# Altium PCB PCB_OuvrePorte2couches.PcbDoc
Units mm, origin at the board's own origin, x right, y up, seen from the top; angles counter-clockwise.
Board outline 127 x 101.6 mm, 2 copper layers (Top Layer, Bottom Layer); 21 components, 24 nets, 115 pads, 0 vias.
Unrouted connection lines stored in the file: 59.
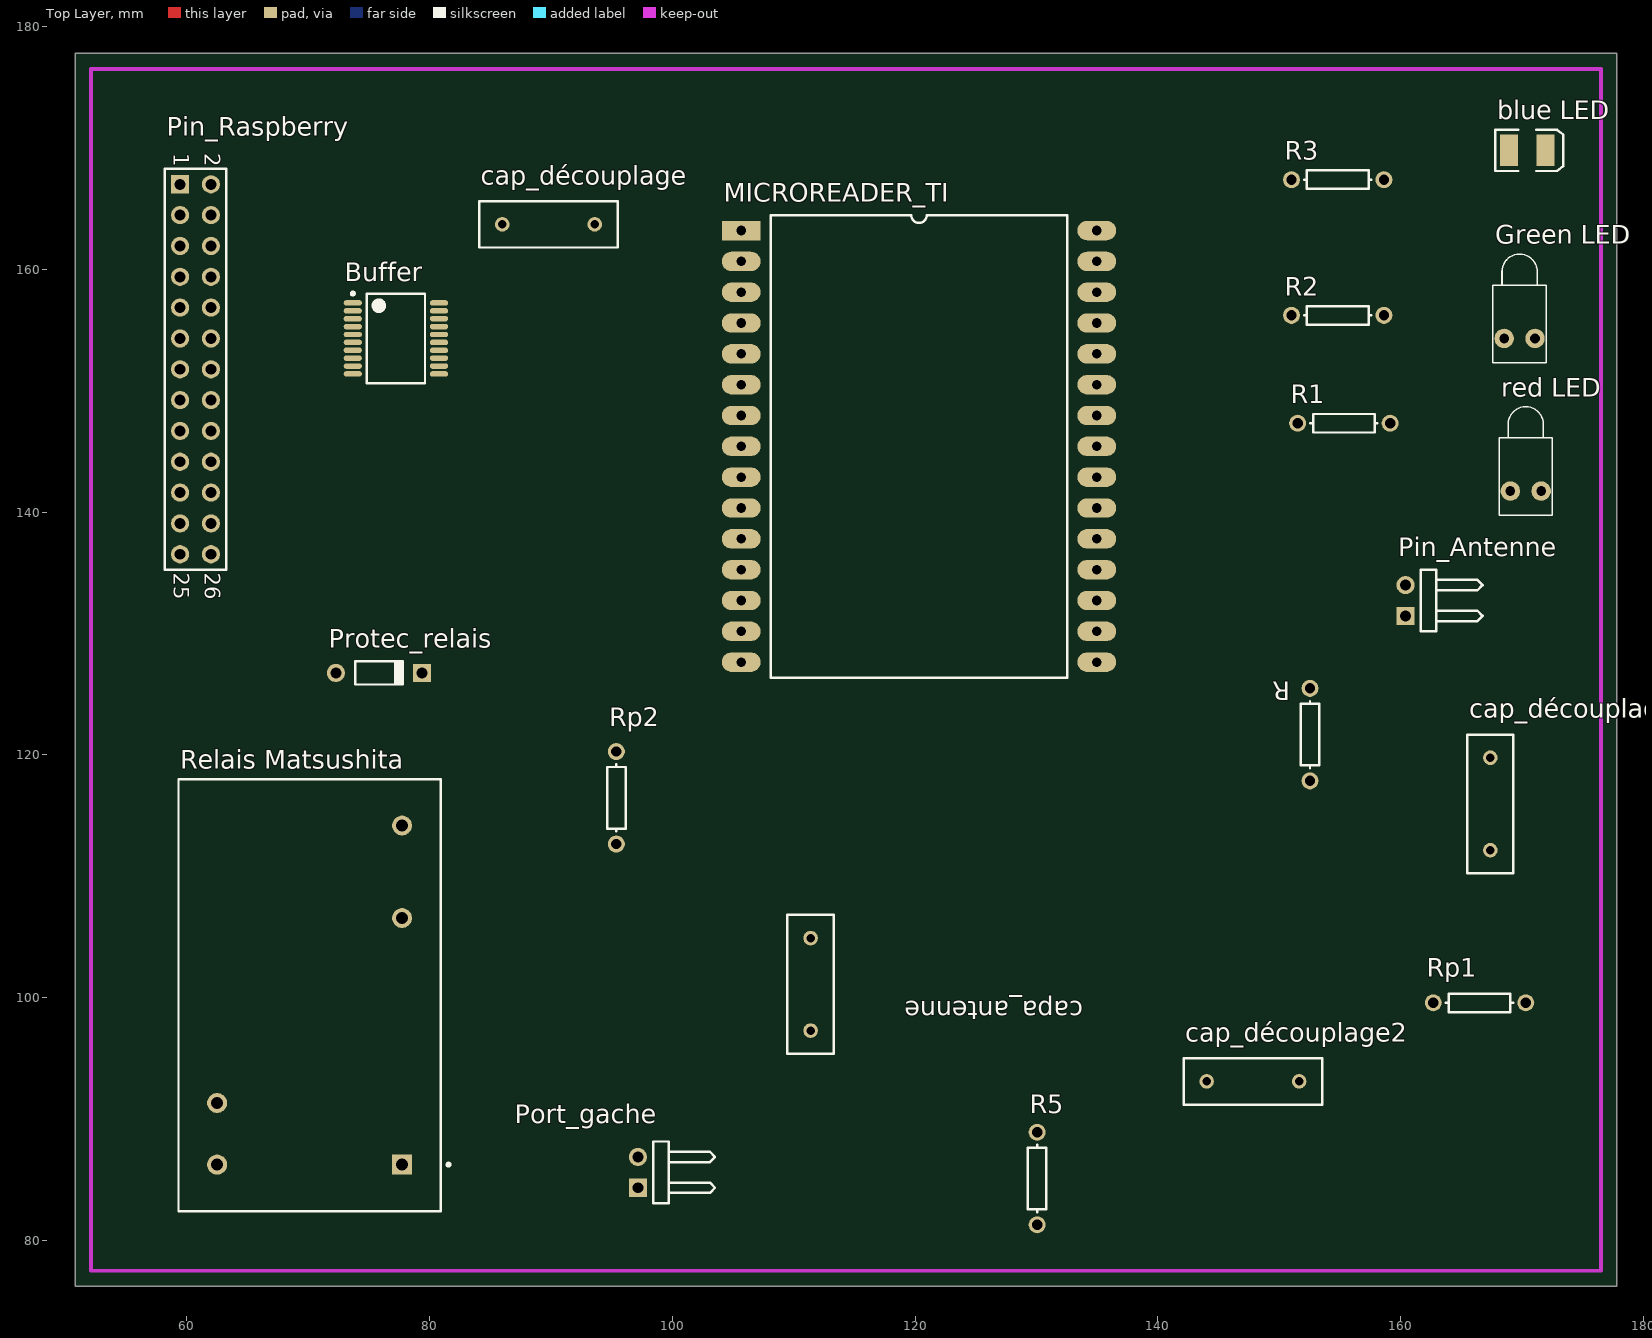
[diagram p0: Top Layer view]
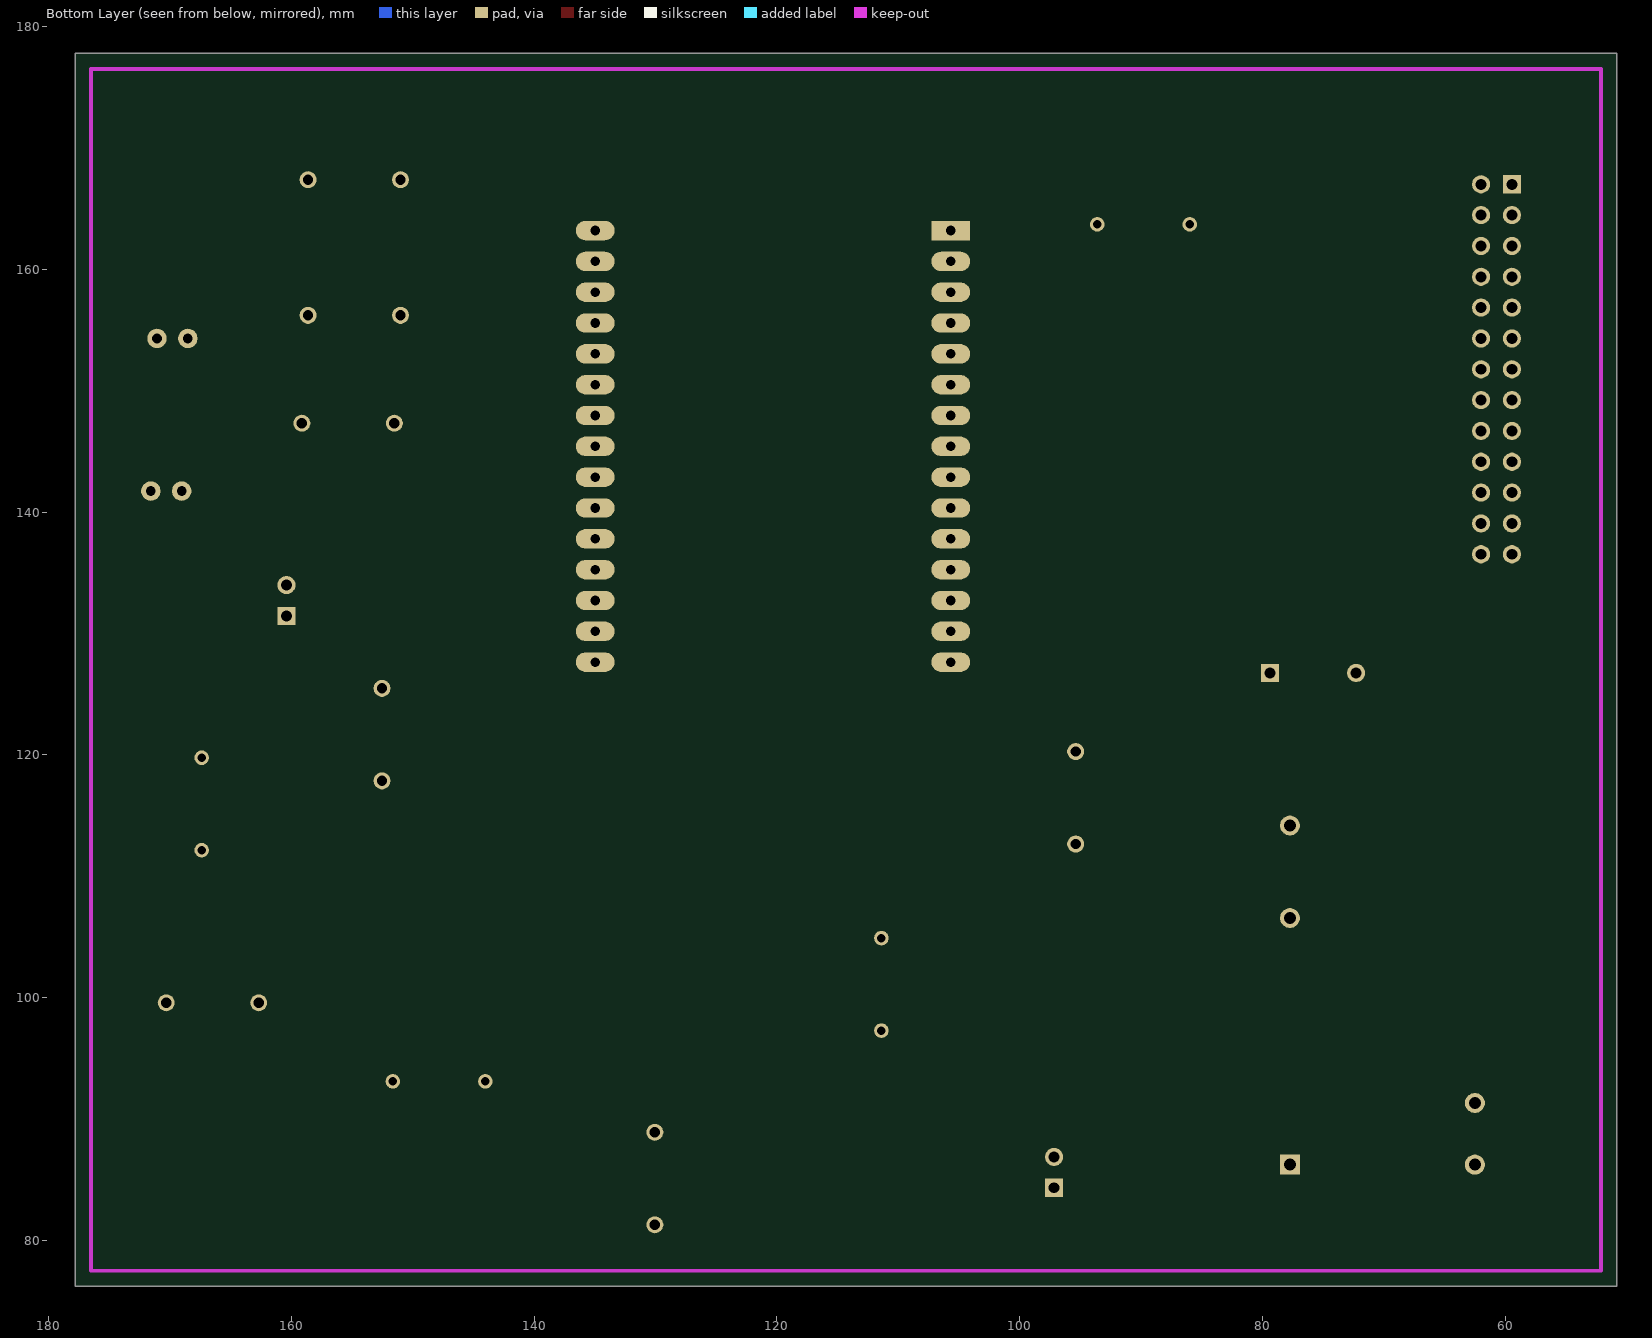
[diagram p1: Bottom Layer view, seen from below]

## Layer stack, top to bottom
Top Layer: signal copper 0.0356
Dielectric: dielectric 0.32, FR-4, Dk 4.8
Bottom Layer: signal copper 0.0356

## Board outline
50.8,76.2 177.8,76.2 177.8,177.8 50.8,177.8

## Design rules (kind name [scope] priority, off if disabled: settings)
Clearance [All] p1: gap=0.2
PolygonConnect [All] p1: connectstyle=Relief reliefconductorwidth=0.254 reliefentries=4 polygonreliefangle="90 Angle" airgapwidth=0.254
RoomDefinition "Schematic Ouvre_Porte" [InComponentClass('Schematic Ouvre_Porte')] p1: confinementstyle=ConfineIn formatcopy=TRUE lockcomponents=FALSE outline 178.943,77.724 485.648,77.724 485.648,119.126 178.943,119.126
RoutingVias [All] p1: holewidth=0.6 width=1 viastyle="Through Hole" minholewidth=0.711 minwidth=1.27 maxholewidth=0.711 maxwidth=1.27
SolderMaskExpansion [All] p1: expansion=0.102
Width [All] p1: maxlimit=0.2 minlimit=0.2 preferedwidth=0.2
28 further rules are at their usual default settings.

## Components (designator, comment, footprint, x,y, rotation, side; value= is the part's Value field where it differs from the comment)
"blue LED" "LED3" 3.5X2.8X1.9 170.434,169.799 r0 top
Buffer "74ACT244MSA" MSA20_L 77.216,154.305 r0 top
cap_découplage "Cap" RAD-0.3 89.789,163.703 r180 top
cap_découplage2 "Cap" RAD-0.3 147.828,93.091 r180 top
cap_découplage3 "Cap" RAD-0.3 167.386,115.951 r270 top
capa_antenne "Cap" RAD-0.3 111.379,101.092 r270 top
"Green LED" "LED1" LED-1 169.799,154.305 r90 top
MICROREADER_TI "MICROREADER" DIP30 105.664,163.195 r0 top
Pin_Antenne "Header 2H" HDR1X2H 160.401,131.445 r90 top
Pin_Raspberry "Header 13X2" HDR2X13 59.436,167.005 r270 top
Port_gache "Header 2H" HDR1X2H 97.155,84.328 r90 top
Protec_relais "Diode 1N4148" DO-35 75.819,126.746 r0 top
R "Res1" AXIAL-0.3 152.527,121.666 r270 top
R1 "Rr" AXIAL-0.3 155.321,147.32 r180 top
R2 "Rg" AXIAL-0.3 154.813,156.21 r180 top
R3 "Rb" AXIAL-0.3 154.813,167.386 r180 top
R5 "Res1" AXIAL-0.3 130.048,85.09 r90 top
"red LED" "LED1" LED-1 170.307,141.732 r90 top
"Relais Matsushita" "Relay" MODULE5B 70.104,100.203 r90 top
Rp1 "" AXIAL-0.3 166.497,99.568 r180 top
Rp2 "Rr" AXIAL-0.3 95.377,116.459 r90 top

## Footprints (in the part's own frame and the unit in brackets; to place one, negate y for a bottom-side part, rotate by r counter-clockwise, add the part's x,y. Pads: shape width x height; smd on the part's side, far side on the other; paste and mask are expansions set on the pad)
3.5X2.8X1.9 [mm] "SM LED; 2 C-Bend Leads; Body 3.5 x 2.8 x 1.9 mm, inc leads (LxWxH typ)"
  rect 1.5x2.6 smd: 1(-1.5,0) 2(1.5,0)
  silkscreen extent -2.65,-1.7 2.95,1.7
AXIAL-0.3 [mm] "Axial Device, Thru-Hole; 2 Leads; 0.3 in Pin Spacing"
  round 1.4 hole 0.85: 1(-3.81,0) 2(3.81,0)
  silkscreen extent -2.77,-0.76 2.77,0.76
DIP30 [mm]
  rect 3.2x1.6 hole 0.8: 1(0,0)
  oval 3.2x1.6 hole 0.8: 2(0,-2.54) 3(0,-5.08) 4(0,-7.62) 5(0,-10.16) 6(0,-12.7) 7(0,-15.24) 8(0,-17.78) 9(0,-20.32) 10(0,-22.86) 11(0,-25.4) 12(0,-27.94) 13(0,-30.48) 14(0,-33.02) 15(0,-35.56) 16(29.3,-35.56) 17(29.3,-33.02) 18(29.3,-30.48) 19(29.3,-27.94) 20(29.3,-25.4) 21(29.3,-22.86) 22(29.3,-20.32) 23(29.3,-17.78) 24(29.3,-15.24) 25(29.3,-12.7) 26(29.3,-10.16) 27(29.3,-7.62) 28(29.3,-5.08) 29(29.3,-2.54) 30(29.3,0)
  silkscreen extent 2.43,-36.83 26.87,1.27
DO-35 [mm] "Diode, Axial; Body 3.8 x 1.9 mm (LxDia. max), Lead Dia. 0.53 mm (max)"
  round 1.5 hole 0.9: 1(-3.55,0)
  rect 1.5x1.5 hole 0.9: 2(3.55,0)
  silkscreen extent -1.95,-0.95 2.05,0.95
HDR1X2H [mm] "Connector; Header; 2 Position; Right Angle"
  rect 1.5x1.5 hole 0.9: 1(0,0)
  round 1.5 hole 0.9: 2(2.54,0)
  silkscreen extent -1.27,-6.35 3.81,-1.27
HDR2X13 [mm] "Connector; Header; 13x2 Position"
  rect 1.5x1.5 hole 0.9: 1(0,0)
  round 1.5 hole 0.9: 2(0,2.54) 3(2.54,0) 4(2.54,2.54) 5(5.08,0) 6(5.08,2.54) 7(7.62,0) 8(7.62,2.54) 9(10.16,0) 10(10.16,2.54) 11(12.7,0) 12(12.7,2.54) 13(15.24,0) 14(15.24,2.54) 15(17.78,0) 16(17.78,2.54) 17(20.32,0) 18(20.32,2.54) 19(22.86,0) 20(22.86,2.54) 21(25.4,0) 22(25.4,2.54) 23(27.94,0) 24(27.94,2.54) 25(30.48,0) 26(30.48,2.54)
  silkscreen extent -1.27,-1.27 31.75,3.81
LED-1 [mm] "LED; 2 Leads"
  round 1.6 hole 0.8: 1(0,1.27) 2(0,-1.27)
  silkscreen extent -2,-2.2 6.95,2.2
MODULE5B [mm] "DIP; 5 Round Pins; Row Space 15.24 mm; Pitch 2.54 mm"
  rect 1.65x1.65 hole 1: 1(-13.97,-7.62)
  round 1.65 hole 1: 2(-13.97,7.62) 3(-8.89,7.62) 4(13.97,-7.62) 5(6.35,-7.62)
  silkscreen extent -17.8,-11.58 17.8,10.8, body extent -17.8,-10.8 17.8,10.8, height 14
MSA20_L [mm] "SOP, 20-Leads, Body 7.3x5.3mm, Pitch 0.65mm, IPC High Density"
  oval 1.5x0.45 smd: 1(-3.55,2.925) 2(-3.55,2.275) 3(-3.55,1.625) 4(-3.55,0.975) 5(-3.55,0.325) 6(-3.55,-0.325) 7(-3.55,-0.975) 8(-3.55,-1.625) 9(-3.55,-2.275) 10(-3.55,-2.925) 11(3.55,-2.925) 12(3.55,-2.275) 13(3.55,-1.625) 14(3.55,-0.975) 15(3.55,-0.325) 16(3.55,0.325) 17(3.55,0.975) 18(3.55,1.625) 19(3.55,2.275) 20(3.55,2.925)
  silkscreen extent -3.67,-3.7 2.4,3.82, body extent -2.68,-3.7 2.68,3.7, height 2.02
RAD-0.3 [mm] "Radial Cap, Thru-Hole; 2 Leads; 0.3 in Pin Spacing"
  round 1.2 hole 0.7: 1(-3.81,0) 2(3.81,0)
  silkscreen extent -5.71,-1.91 5.71,1.91

## Part data
"blue LED": "Typical BLUE SiC LED"
Buffer: "Octal Buffer/Line Driver with 3-State Output"
cap_découplage cap_découplage2 cap_découplage3 capa_antenne: "Capacitor"
"Green LED" "red LED": "Typical RED GaAs LED"
Pin_Antenne Port_gache: "Header, 2-Pin, Right Angle"
Pin_Raspberry: "Header, 13-Pin, Dual row"
Protec_relais: "High Conductance Fast Diode"
R R5: "Resistor"
R1 R2 R3 Rp1 Rp2: library part Res1, "Resistor"
"Relais Matsushita": "SPDT Relay"

## Nets (pads, with @x,y where several pads share a name; then routed paths per layer and width w, separated by ;. In a path a pad name is that pad's centre, name@x,y a point inside that pad or via, vN(x,y) a via of type N, cw(c..) or ccw(c..) an arc to the next point about the centre after c; other vN are vias at no path point)
5V: "Relais Matsushita.4" Buffer.20 cap_découplage2.2 cap_découplage3.1 cap_découplage.2 MICROREADER_TI.22 MICROREADER_TI.24 Pin_Raspberry.2 Protec_relais.2 R.2
GND: "blue LED.2" "Green LED.2" "red LED.2" Buffer.1 Buffer.10 Buffer.19 cap_découplage2.1 cap_découplage3.2 cap_découplage.1 MICROREADER_TI.2 MICROREADER_TI.15 MICROREADER_TI.21 MICROREADER_TI.25 Pin_Raspberry.6 Pin_Raspberry.9 Pin_Raspberry.14 Pin_Raspberry.20 Pin_Raspberry.25 R5.1 Rp1.1
"Netblue LED_1": "blue LED.1" R3.2
NetBuffer_2: Buffer.2 Pin_Raspberry.16
NetBuffer_3: "Relais Matsushita.5" Buffer.3 Buffer.5 Buffer.7 Buffer.9 Protec_relais.1
NetBuffer_4: Buffer.4 Pin_Raspberry.18
NetBuffer_6: Buffer.6 Pin_Raspberry.22
NetBuffer_11: Buffer.11 Buffer.13 Buffer.15 Buffer.17 Pin_Raspberry.11
NetBuffer_12: Buffer.12 MICROREADER_TI.5
NetBuffer_14: Buffer.14 R1.1
NetBuffer_16: Buffer.16 R2.1
NetBuffer_18: Buffer.18 R3.1
Netcapa_antenne_1: capa_antenne.1 MICROREADER_TI.17
Netcapa_antenne_2: capa_antenne.2 MICROREADER_TI.16 Pin_Antenne.1
"NetGreen LED_1": "Green LED.1" R2.2
NetMICROREADER_TI_6: MICROREADER_TI.6 Rp2.2
NetMICROREADER_TI_19: MICROREADER_TI.19 Pin_Antenne.2
NetMICROREADER_TI_26: MICROREADER_TI.26 R.1
NetMICROREADER_TI_27: MICROREADER_TI.27 R5.2
NetPort_gache_1: "Relais Matsushita.1" Port_gache.1
NetPort_gache_2: "Relais Matsushita.3" Port_gache.2
NetR1_2: "red LED.1" R1.2
RXD: Pin_Raspberry.10 Rp1.2 Rp2.1
TXD: Buffer.8 Pin_Raspberry.8
pads on no net: "Relais Matsushita.2" MICROREADER_TI.1 MICROREADER_TI.3 MICROREADER_TI.4 MICROREADER_TI.7 MICROREADER_TI.8 MICROREADER_TI.9 MICROREADER_TI.10 MICROREADER_TI.11 MICROREADER_TI.12 MICROREADER_TI.13 MICROREADER_TI.14 MICROREADER_TI.18 MICROREADER_TI.20 MICROREADER_TI.23 MICROREADER_TI.28 MICROREADER_TI.29 MICROREADER_TI.30 Pin_Raspberry.1 Pin_Raspberry.3 Pin_Raspberry.4 Pin_Raspberry.5 Pin_Raspberry.7 Pin_Raspberry.12 Pin_Raspberry.13 Pin_Raspberry.15 Pin_Raspberry.17 Pin_Raspberry.19 Pin_Raspberry.21 Pin_Raspberry.23 Pin_Raspberry.24 Pin_Raspberry.26

## Keep-outs
Keep-Out Layer:
  lines w0.3: 52.1,77.5 176.5,77.5 176.5,176.5 52.1,176.5 52.1,77.5

## Silkscreen, mask and mechanical layers (free items; w line width, h text height)
Drill Drawing:
  text ".LEGEND" at 182.88,81.28 h1.52
  text "Drill Drawing." at 182.88,78.74 h1.52

## Dimensions
52.1,77.5 to 176.5,77.5 on Mechanical 1
52.1,77.5 to 52.1,176.5 on Mechanical 1

## Text inside footprints (layer, text, board x,y; h text height)
Pin_Raspberry: Top Overlay "26" at 61.468,135.001 h1.27 r270; Top Overlay "25" at 58.928,135.001 h1.27 r270; Top Overlay "1" at 58.928,169.545 h1.27 r270; Top Overlay "2" at 61.468,169.545 h1.27 r270